# Altium PCB CIrk.PcbDoc
Units mil, origin at the board's own origin, x right, y up, seen from the top; angles counter-clockwise.
Board outline 1450 x 1625 mil, 2 copper layers (Top Layer, Bottom Layer); 12 components, 20 nets, 69 pads, 0 vias.
Unrouted connection lines stored in the file: 1.
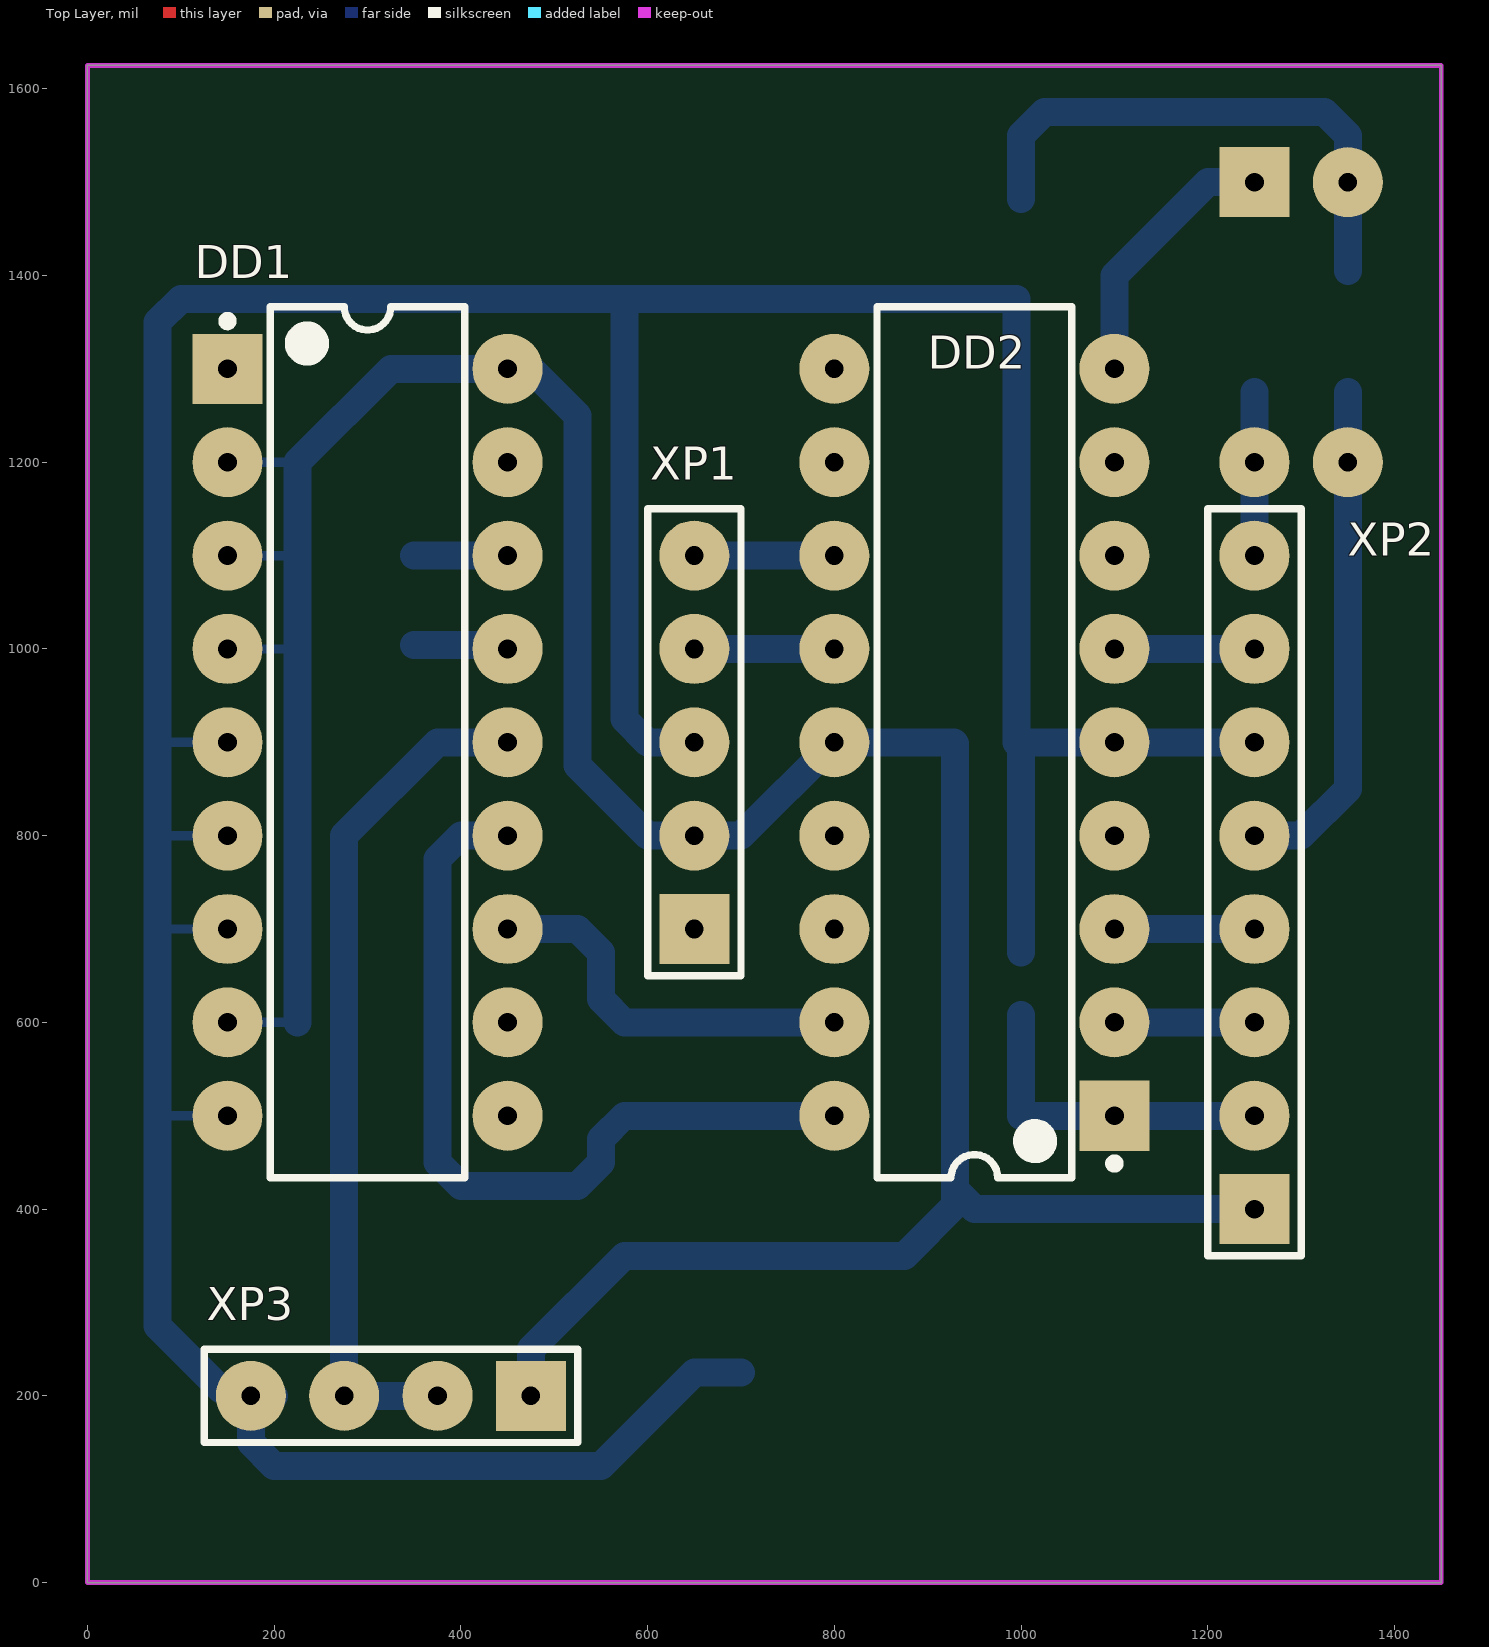
[diagram p0: Top Layer view]
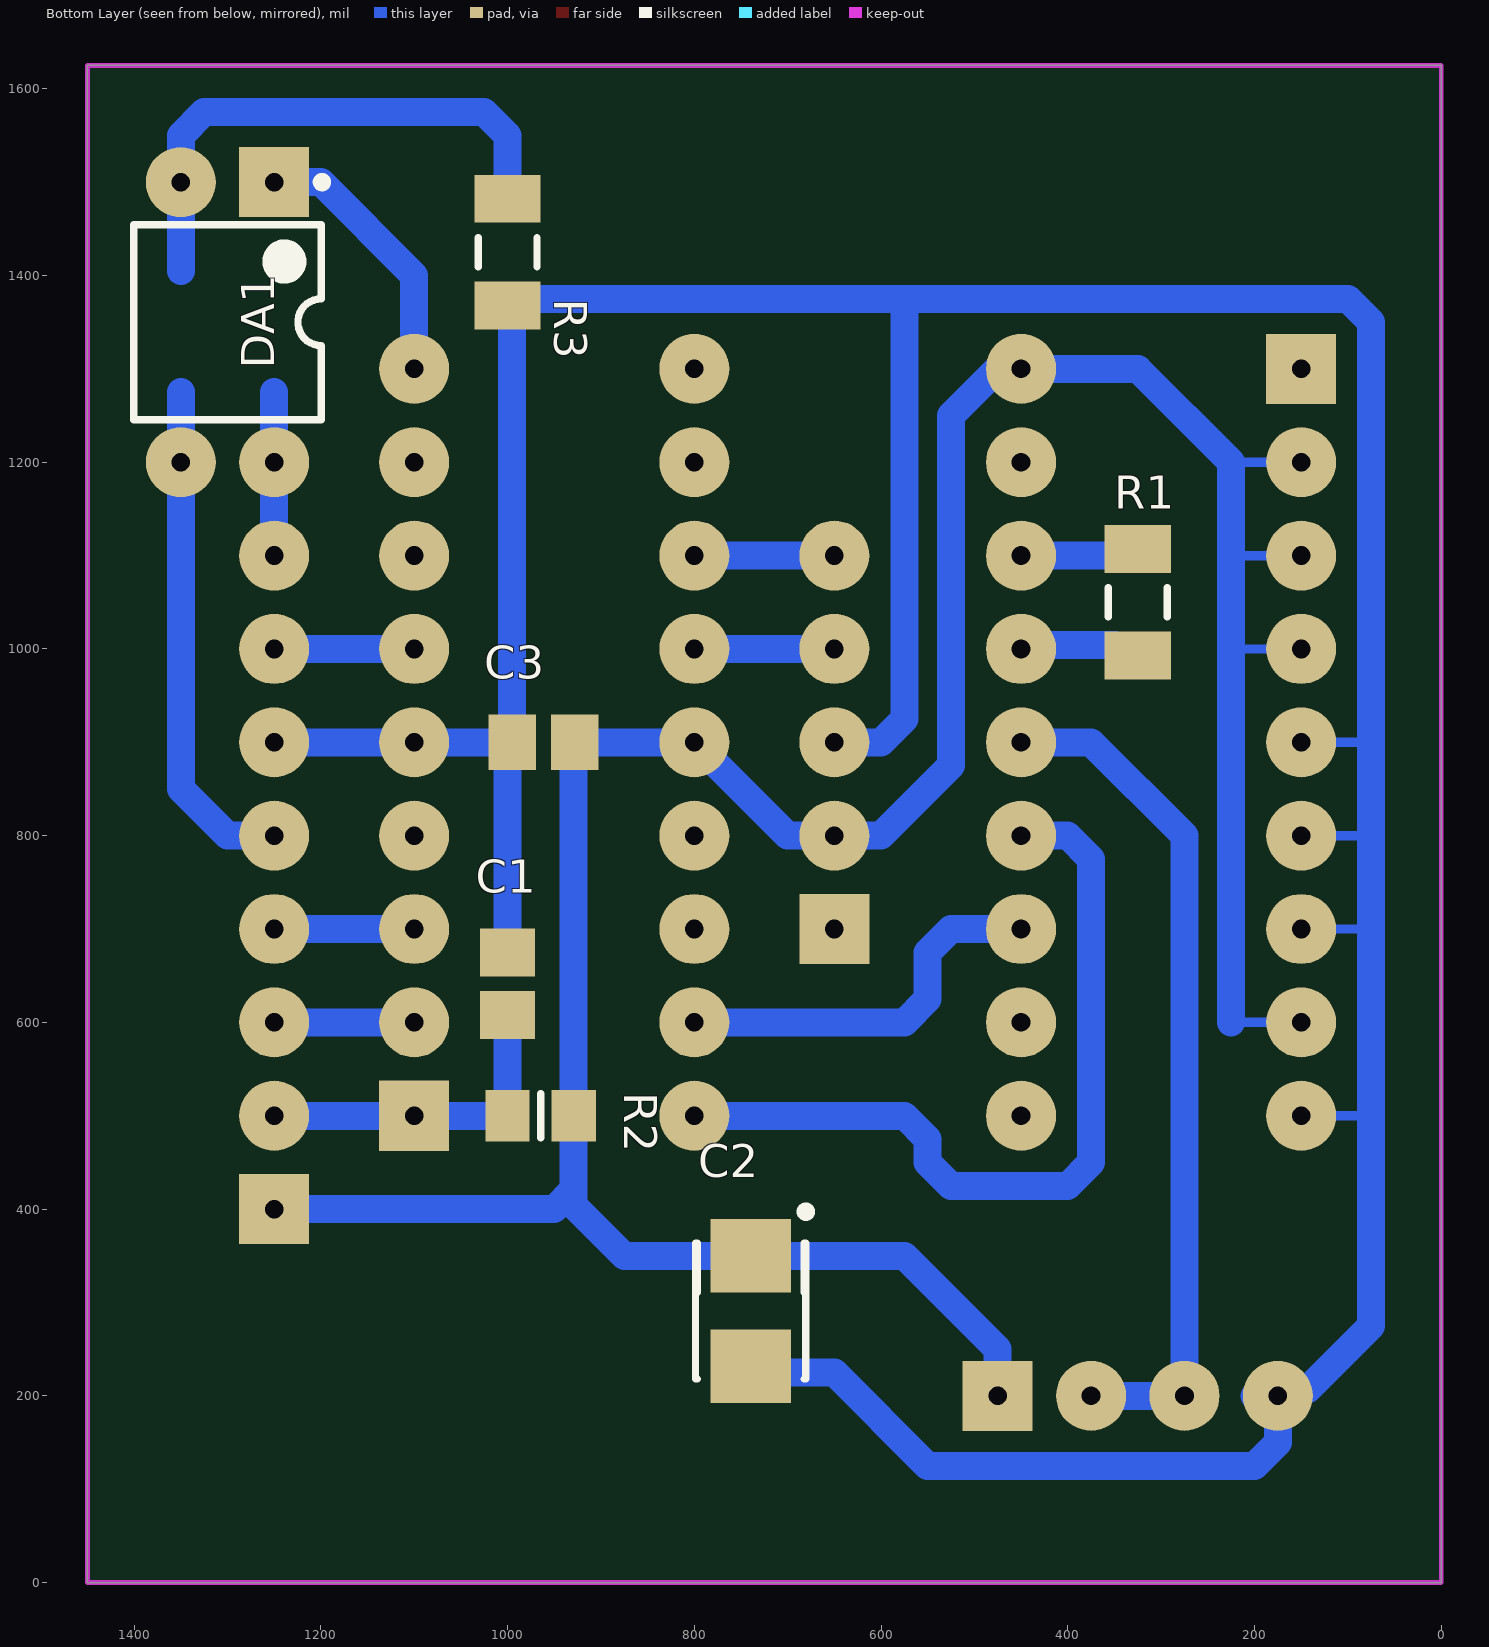
[diagram p1: Bottom Layer view, seen from below]

## Layer stack, top to bottom
Top Layer: signal copper 1.4
Dielectric: dielectric 12.6, FR-4, Dk 4.8
Bottom Layer: signal copper 1.4

## Board outline
0,0 1450,0 1450,1625 0,1625

## Design rules (kind name [scope] priority, off if disabled: settings)
Clearance [All] p1: gap=10
PolygonConnect [All] p1: connectstyle=Relief reliefconductorwidth=10 reliefentries=4 polygonreliefangle="90 Angle" airgapwidth=10
RoomDefinition CirkPic [InComponentClass('CirkPic')] p1: confinementstyle=ConfineIn formatcopy=TRUE lockcomponents=FALSE outline 0,0 1450,0 1450,1625 0,1625
RoutingVias [All] p1: holewidth=28 width=50 viastyle="Through Hole" minholewidth=28 minwidth=50 maxholewidth=28 maxwidth=50
SilkToSolderMaskClearance SilkscreenOverComponentPads [IsPad] p1: minsilkscreentomaskgap=10 clearancetoexposedcopper=TRUE
SolderMaskExpansion [All] p1: expansion=4
Width [All] p1: maxlimit=30 minlimit=10 preferedwidth=30
27 further rules are at their usual default settings.

## Components (designator, comment, footprint, x,y, rotation, side; value= is the part's Value field where it differs from the comment)
C1 "Cap" CAPC2012N 1000,675 r270 bottom
C2 "Cap Pol1" TC3528-1411 739.57,350 r270 bottom
C3 "Cap" CAPC2012N 995,900 r180 bottom
DA1 "Optoisolator2" DIP-4 1300,1350 r270 bottom
DD1 "PT2272-L4" DIP-18 150,1300 r0 top
DD2 "PIC16F628-E/P" DIP-18 1100,500 r180 top
R1 "Res2" RESC3216N 325,1050 r270 bottom
R2 "Res2" RESC2012N 1000,500 r180 bottom
R3 "Res2" RESC3216N 1000,1425 r270 bottom
XP1 "ICSP" HDR1X5 650,700 r90 top
XP2 "Out" HDR1X8 1250,400 r90 top
XP3 "Reciver" HDR1X4 475,200 r180 top

## Footprints (in the part's own frame and the unit in brackets; to place one, negate y for a bottom-side part, rotate by r counter-clockwise, add the part's x,y. Pads: shape width x height; smd on the part's side, far side on the other; paste and mask are expansions set on the pad)
CAPC2012N [mm] "Chip Capacitor, Body 2.0x1.3mm, IPC Medium Density"
  rect 1.3x1.5 smd: 1(0,0) 2(1.7,0)
  body extent -0.25,-0.72 1.95,0.72, height 1.1
DIP-4 [mil] "DIP, 4-Pin, Row Spacing 7.62 mm, Pitch 2.54 mm"
  rect 75x75 hole 20: 1(-150,50)
  round 75 hole 20: 2(-150,-50) 3(150,-50) 4(150,50)
  silkscreen extent -155,-100 104,106, body extent -124,-98 124,98, height 180
DIP-18 [mil] "DIP; 18 Leads; Row Spacing 7.62 mm; Pitch 2.54 mm"
  rect 75x75 hole 20: 1(0,0)
  round 75 hole 20: 2(0,-100) 3(0,-200) 4(0,-300) 5(0,-400) 6(0,-500) 7(0,-600) 8(0,-700) 9(0,-800) 10(300,-800) 11(300,-700) 12(300,-600) 13(300,-500) 14(300,-400) 15(300,-300) 16(300,-200) 17(300,-100) 18(300,0)
  silkscreen extent -5,-867 254,67, body extent 8,-865 292,65, height 200
HDR1X4 [mil] "Connector; Header; 4 Position"
  rect 75x75 hole 20: 1(0,0)
  round 75 hole 20: 2(100,0) 3(200,0) 4(300,0)
  silkscreen extent -50,-50 350,50
HDR1X5 [mil] "Connector; Header; 5 Position"
  rect 75x75 hole 20: 1(0,0)
  round 75 hole 20: 2(100,0) 3(200,0) 4(300,0) 5(400,0)
  silkscreen extent -50,-50 450,50
HDR1X8 [mil] "Connector; Header; 8 Position"
  rect 75x75 hole 20: 1(0,0)
  round 75 hole 20: 2(100,0) 3(200,0) 4(300,0) 5(400,0) 6(500,0) 7(600,0) 8(700,0)
  silkscreen extent -50,-50 750,50
RESC2012N [mm] "Chip Resistor, Body 2.0x1.3mm, IPC Medium Density"
  rect 1.2x1.4 smd: 1(0,0) 2(1.8,0)
  silkscreen extent 0.9,-0.6 0.9,0.6, body extent -0.18,-0.7 1.97,0.7, height 0.65
RESC3216N [mm] "Chip Resistor, Body 3.2x1.6mm, IPC Medium Density"
  rect 1.3x1.8 smd: 1(-1.45,0) 2(1.45,0)
  silkscreen extent -0.4,-0.8 0.4,0.8, body extent -1.68,-0.87 1.68,0.87, height 0.71
TC3528-1411 [mm] "Capacitor, SM Tantalum; Body 3.5 x 2.8 mm (LxW typ)"
  rect 2x2.2 smd: 1(0,0) 2(3,0)
  silkscreen extent -1.32,-1.5 3.35,1.62

## Part data
C1 C3: "Capacitor"
C2: "Polarized Capacitor (Radial)"
DA1: "5 Pin Mini Flat Pack Optocoupler"
DD1: library part PT2272
DD2: library part PIC16F628A-E/P, "FLASH-Based 8-Bit CMOS Microcontroller with nanoWatt Technology, 2K (x14-Bit words) FLASH, 224 Bytes SRAM, 18-Pin PDIP, 3.0 to 5.5V Supply Range, Extended Temperature"
R1 R2 R3: "Resistor"
XP1: library part "Header 5", "Header, 5-Pin"
XP2: library part "Header 8", "Header, 8-Pin"
XP3: library part "Header 4", "Header, 4-Pin"

## Nets (pads, with @x,y where several pads share a name; then routed paths per layer and width w, separated by ;. In a path a pad name is that pad's centre, name@x,y a point inside that pad or via, vN(x,y) a via of type N, cw(c..) or ccw(c..) an arc to the next point about the centre after c; other vN are vias at no path point)
+5: C2.1 C3.2 DD1.2 DD1.3 DD1.4 DD1.8 DD1.18 DD2.14 R2.2 XP1.2 XP2.1 XP3.1 | length 3585.6
  Bottom Layer w10: DD1.8 225,600 ; DD1.4 225,1000 ; DD1.3 225,1100 ; DD1.2 225,1200
  Bottom Layer w30: 225,600 225,1000 225,1100 225,1200 325,1300 475,1300 525,1250 525,875 600,800 XP1.2 700,800 DD2.14 C3.2 929.13,898.94 R2.2 ; XP3.1 475,250 575,350 875,350 929.13,404.13 R2.2 ; XP2.1 950,400 929.13,420.87 R2.2
BLOCK: DD1.12 DD2.17 | length 420.7
  Bottom Layer w30: DD1.12 525,700 550,675 550,625 575,600 DD2.17
CLK: DD2.12 XP1.5 | length 150
  Bottom Layer w30: XP1.5 DD2.12
DAT: DD2.13 XP1.4 | length 150
  Bottom Layer w30: XP1.4 DD2.13
DIN: DD1.14 XP3.2 XP3.3 | length 916.4
  Bottom Layer w30: XP3.2 XP3.3 275,800 375,900 DD1.14
DT0: DD1.10
DT1: DD1.11
GND: C1.1 C2.2 C3.1 DD1.5 DD1.6 DD1.7 DD1.9 DD2.5 R3.2 XP1.3 XP2.6 XP3.4 | length 4558.9
  Bottom Layer w10: 75,500 DD1.9 ; 75,700 DD1.7 ; 75,800 DD1.6 ; 75,900 DD1.5
  Bottom Layer w30: XP3.4 168.11,206.89 143.11,206.89 75,275 75,500 75,700 75,800 75,900 75,1350 100,1375 575,1375 ; XP3.4@200,200 175,175 175,150 200,125 550,125 650,225 C2.2@700,225 ; XP1.3 600,900 575,925 575,1375 ; C1.1 C3.1@1000,895 ; XP2.6 DD2.5 C3.1 995,1375 575,1375
GUN: DD2.3 XP2.4 | length 150
  Bottom Layer w30: DD2.3 XP2.4
IMPULS: C1.2 DD2.1 R2.1 XP2.2 | length 358.1
  Bottom Layer w30: C1.2 R2.1 DD2.1 XP2.2
NetDA1_2: DA1.2 R3.1 | length 583.6
  Bottom Layer w30: R3.1 1000,1550 1025,1575 1105,1575 1325,1575 1350,1550 DA1.2 1350,1405
NetDD1_15: DD1.15 R1.2 | length 101.7
  Bottom Layer w30: R1.2@350,1004.13 445.87,1004.13 DD1.15
NetDD1_16: DD1.16 R1.1 | length 100
  Bottom Layer w30: R1.1@350,1100 DD1.16
OGUN: DD2.6 XP2.7 | length 150
  Bottom Layer w30: DD2.6 1150,1000 XP2.7
OIMPULS: DD2.2 XP2.3 | length 150
  Bottom Layer w30: DD2.2 XP2.3
START: DA1.1 DD2.9 | length 291.4
  Bottom Layer w30: DD2.9 1100,1400 1200,1500 DA1.1
START+: DA1.3 XP2.5 | length 545.7
  Bottom Layer w30: XP2.5 1300,800 1350,850 DA1.3 1350,1275
START-: DA1.4 XP2.8 | length 175
  Bottom Layer w30: XP2.8 DA1.4 1250,1275
UBLOCK: DD1.13 DD2.18 | length 891.4
  Bottom Layer w30: DD1.13 400,800 375,775 375,450 400,425 525,425 550,450 550,475 575,500 DD2.18
VPP: DD2.4 XP1.1
pads on no net: DD1.1 DD1.17 DD2.7 DD2.8 DD2.10 DD2.11 DD2.15 DD2.16

## Keep-outs
Keep-Out Layer:
  the board outline again, w5

## Dimensions
0,1625 to 1450,1625 on Bottom Layer
0,1625 to 0,0 on Bottom Layer